# EAGLE board Radii (EAGLE 9.5.1)
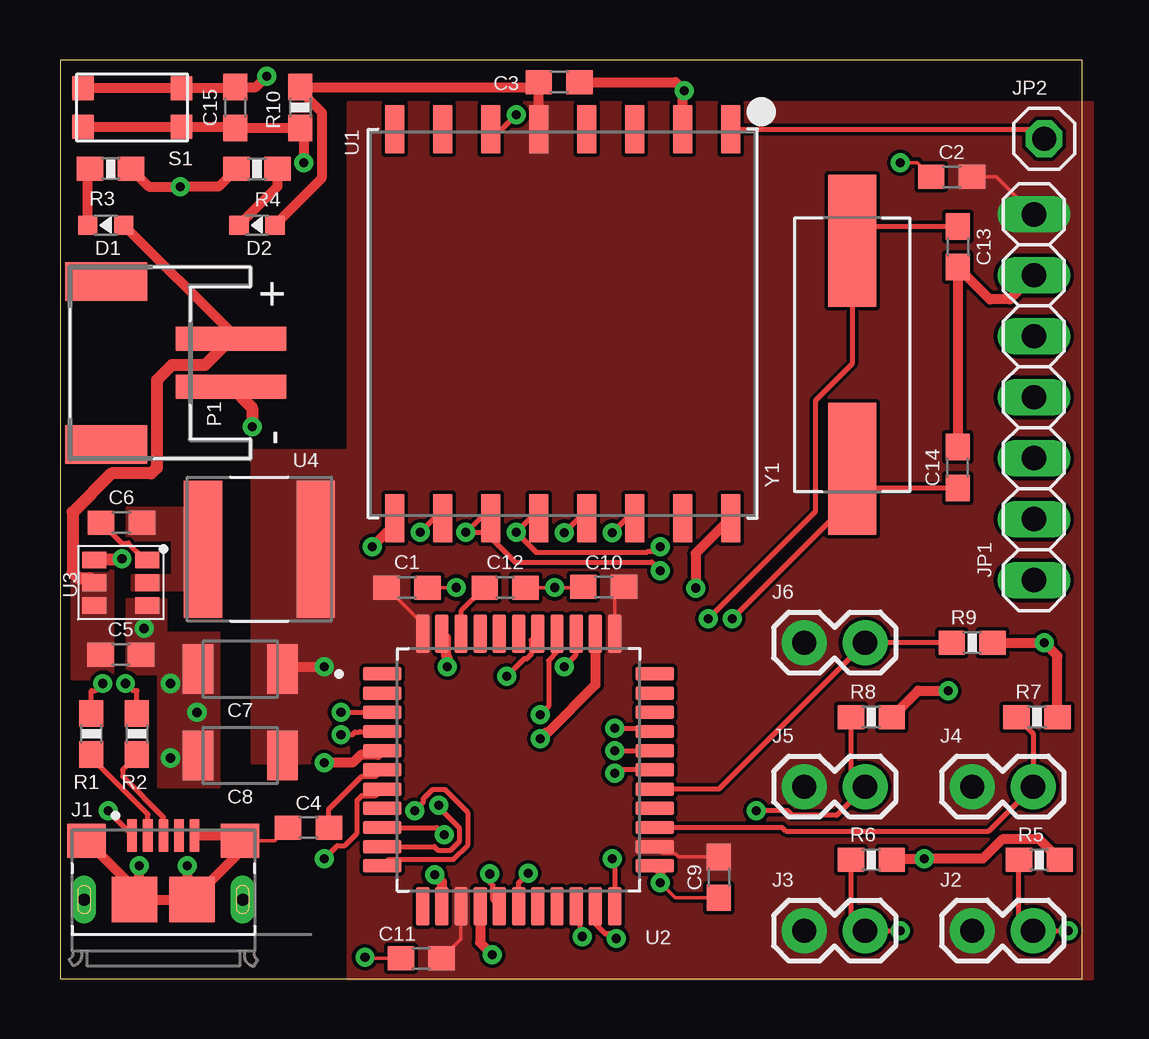
[diagram p0: board, top side]
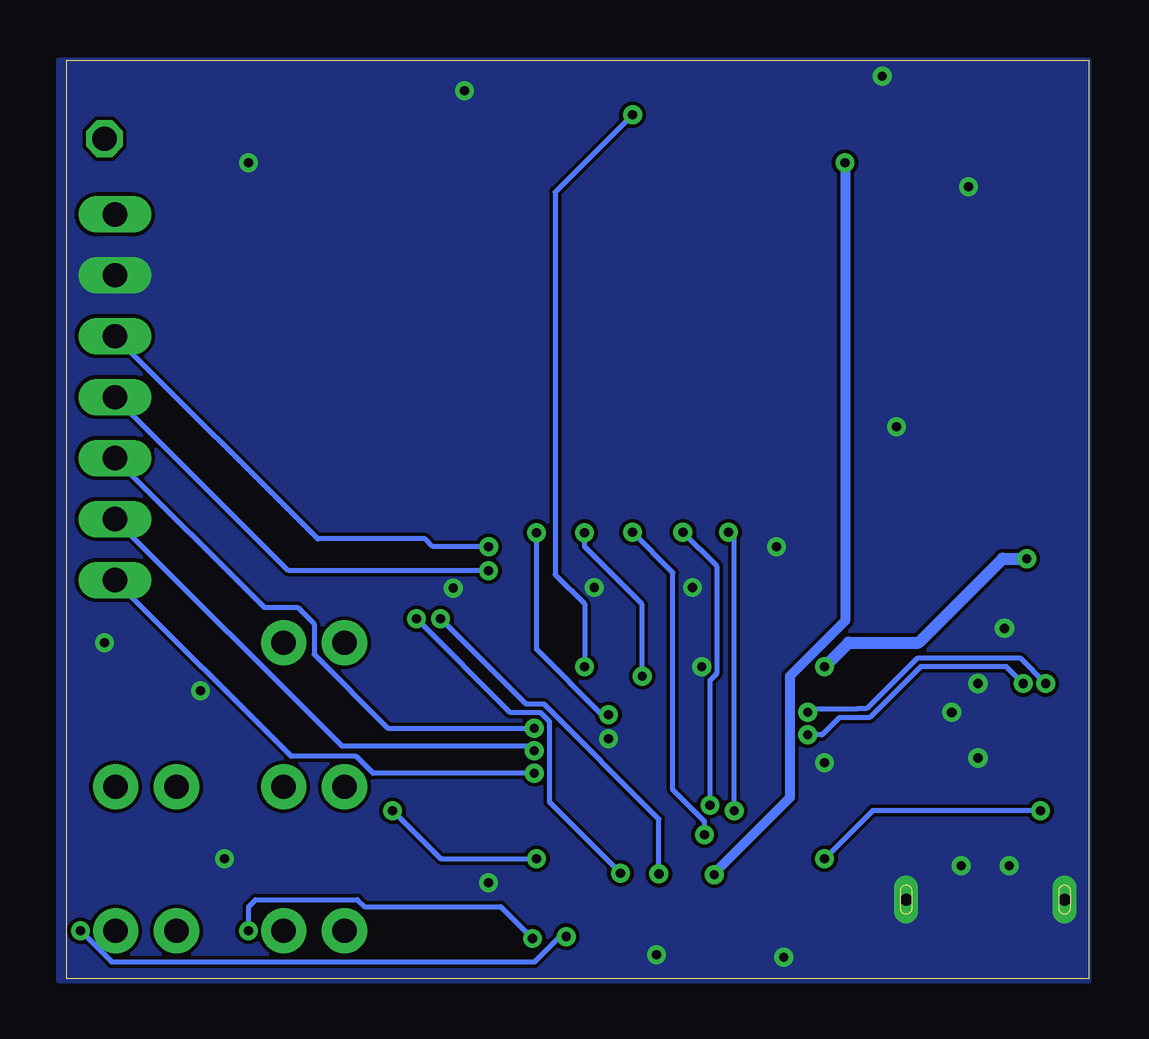
[diagram p1: board, bottom side, seen from below]

Size 42.58 x 38.28 mm. Coordinates in mm from the lower left corner, seen from the top.
Outline: 0,0 42.58,0 42.58,38.28 0,38.28 0,0
Copper layers (1*16): Top 0.0356mm / dielectric 63mil / Bottom 0.0356mm
Design rules "RJ2LayerDRU": minimum track width 6mil, minimum drill 15mil, track to track 6mil, track to pad 6mil, pad to pad 6mil, via to via 6mil, smd to smd 6mil, copper to edge 0mil, drill to drill 6mil, minimum pad ring 10mil, minimum via ring 8mil, stop-mask expansion 4mil, vias tented up to drill 0mil, thermal gap 10mil
Net classes: 1 diff: width 0.004 mm

## Footprints (pad centres in the part's own frame; a part is rotated, then mirrored left to right if it is on the bottom)
0603 = smd 1.1 x 1: 1 -0.85,0; 2 0.85,0
1210 = smd 1.27 x 2.06: 1 -1.755,0; 2 1.755,0
CHIP-LED0603 = smd 0.8 x 0.8: A 0,-0.75; C 0,0.75
FCI_10118193-0001LF = smd 0.4 x 1.35: 1 -1.3,2.675; 2 -0.65,2.675; 3 0,2.675; 4 0.65,2.675; 5 1.3,2.675 | smd 1.6 x 1.4: S1 -3.2,2.45; S2 3.2,2.45 | smd 1.9 x 1.9: S3 1.2,0; S4 -1.2,0 | drill 0.5 pad 0.9 long: S5 -3.3,0; S6 3.3,0
1X02 = drill 1.016 pad 1.88: 1 0,0; 2 2.54,0
1X07 = drill 1.016 long: 1 -7.62,0; 2 -5.08,0; 3 -2.54,0; 4 0,0; 5 2.54,0; 6 5.08,0; 7 7.62,0
1X01 = drill 1.016 octagon: 1 0,0
JST-PH-2-SMT-RA = smd 1 x 4.6: 1 1,-3.7; 2 -1,-3.7 | smd 1.6 x 3.4: NC1 -3.4,1.5; NC2 3.4,1.5
0603-RES = smd 1.1 x 1: 1 -0.85,0; 2 0.85,0
KMR2 = smd 0.9 x 1: 1.1 -2.05,0.8; 1.2 2.05,0.8; 2.1 -2.05,-0.8; 2.2 2.05,-0.8
RFMHCW_SMT = smd 2 x 0.8: 1P 8.1,-7; 2P 8.1,-5; 3P 8.1,-3; 4P 8.1,-1; 5P 8.1,1; 6P 8.1,3; 7P 8.1,5; 8P 8.1,7; 9P -8.1,7; 10P -8.1,5; 11P -8.1,3; 12P -8.1,1; 13P -8.1,-1; 14P -8.1,-3; 15P -8.1,-5; 16P -8.1,-7
QFP80P1200X1200X120-44N = smd 1.6 x 0.55: 1 -5.68,4; 2 -5.68,3.2; 3 -5.68,2.4; 4 -5.68,1.6; 5 -5.68,0.8; 6 -5.68,0; 7 -5.68,-0.8; 8 -5.68,-1.6; 9 -5.68,-2.4; 10 -5.68,-3.2; 11 -5.68,-4; 23 5.68,-4; 24 5.68,-3.2; 25 5.68,-2.4; 26 5.68,-1.6; 27 5.68,-0.8; 28 5.68,0; 29 5.68,0.8; 30 5.68,1.6; 31 5.68,2.4; 32 5.68,3.2; 33 5.68,4 | smd 0.55 x 1.6: 12 -4,-5.68; 13 -3.2,-5.68; 14 -2.4,-5.68; 15 -1.6,-5.68; 16 -0.8,-5.68; 17 0,-5.68; 18 0.8,-5.68; 19 1.6,-5.68; 20 2.4,-5.68; 21 3.2,-5.68; 22 4,-5.68; 34 4,5.68; 35 3.2,5.68; 36 2.4,5.68; 37 1.6,5.68; 38 0.8,5.68; 39 0,5.68; 40 -0.8,5.68; 41 -1.6,5.68; 42 -2.4,5.68; 43 -3.2,5.68; 44 -4,5.68
POWERREG = smd 1 x 0.7: 1 -1.099,0.95; 2 -1.099,0; 3 -1.099,-0.95; 4 1.099,-0.95; 5 1.099,0; 6 1.099,0.95
IND_1255AY-3R9N=P3 = smd 1.6 x 5.7: 1 -2.35,0; 2 2.35,0
XTAL_ECS-80-20-5PX-TR = smd 5.5 x 2: 1 -4.75,0; 2 4.75,0

## Placement (x,y rotation side)
C1  0.1uF  [0603]  14.45,16.3 0 top
C2  0.1uF  [0603]  37.15,33.42 180 top
C3  0.1uF  [0603]  20.79,37.36 0 top
C4  1.0uF  [0603]  10.35,6.3 180 top
C5  10uF  [0603]  2.52,13.5 0 top
C6  0.1uF  [0603]  2.55,19 0 top
C7  22uF  [1210]  7.5,12.9 180 top
C8  22uF  [1210]  7.5,9.3 180 top
C9  0.1uF  [0603]  27.45,4.22 270 top
C10  0.1uF  [0603]  22.64,16.32 180 top
C11  0.1uF  [0603]  15.04,0.85 180 top
C12  10nF  [0603]  18.54,16.3 0 top
C13  33pF  [0603]  37.4,30.5 270 top
C14  33pF  [0603]  37.4,21.3 90 top
C15  0.1uF  [0603]  7.3,36.3 90 top
D1  GREEN  [CHIP-LED0603]  1.9,31.4 90 top
D2  GREEN  [CHIP-LED0603]  8.2,31.4 90 top
J1  10118193-0001LF  [FCI_10118193-0001LF]  4.3,3.3 0 top
J2  BUTTON  [1X02]  38,2 0 top
J3  BUTTON  [1X02]  31,2 0 top
J4  BUTTON  [1X02]  38,8 0 top
J5  BUTTON  [1X02]  31,8 0 top
J6  BUTTON  [1X02]  31,14 0 top
JP1  [1X07]  40.57,24.23 270 top
JP2  [1X01]  41,35 0 top
P1  [JST-PH-2-SMT-RA]  3.42,25.66 90 top
R1  22Ω  [0603-RES]  1.3,10.2 90 top
R2  22Ω  [0603-RES]  3.2,10.2 90 top
R3  400Ω  [0603-RES]  2.1,33.75 0 top
R4  100Ω  [0603-RES]  8.2,33.75 180 top
R5  10K  [0603-RES]  40.8,4.95 0 top
R6  10K  [0603-RES]  33.8,4.95 0 top
R7  10K  [0603-RES]  40.7,10.9 0 top
R8  10K  [0603-RES]  33.8,10.9 0 top
R9  10K  [0603-RES]  38,14 0 top
R10  10K  [0603-RES]  10,36.3 270 top
S1  KMR2  [KMR2]  3,36.3 180 top
U1  [RFMHCW_SMT]  20.95,27.3 90 top
U2  ATMEGA32U4-AUR  [QFP80P1200X1200X120-44N]  19.1,8.7 0 top
U3  AP63203WU-7  [POWERREG]  2.52,16.5 0 top
U4  IND_1255AY-3R9N=P3  [IND_1255AY-3R9N=P3]  8.3,17.9 0 top
Y1  ECS-80-20-5PX-TR  [XTAL_ECS-80-20-5PX-TR]  33,26 90 top

## Library data of the parts
C1-C3 C6 C9-C11 C15 = SparkFun-Capacitors; PROD_ID: CAP-00810
C4 = SparkFun-Capacitors; PROD_ID: CAP-00868
C5 = SparkFun-Capacitors; PROD_ID: CAP-11015
C7 C8 = SparkFun-Capacitors
C12 = SparkFun-Capacitors; PROD_ID: CAP-00867
C13 C14 = SparkFun-Capacitors; PROD_ID: CAP-10142
D1 D2 = RoboJackets-LEDs
J1 = I'mRADIOactive; DESCRIPTION: USB - micro B USB 2.0 Receptacle Connector 5 Position Surface Mount, Right Angle; Through Hole; DIGI-KEY_PART_NUMBER: 609-4616-1-ND; DIGIKEY-PURCHASE-URL: https://snapeda.com/shop?store=DigiKey&id=4800618; MF: Amphenol ICC (FCI); MP: 10118193-0001LF; PACKAGE: None
J2-J6 JP1 U1 U3 U4 = I'mRADIOactive
JP2 = pinhead
P1 = adafruit
R1 R2 = SparkFun-Resistors; PROD_ID: RES-08698
R3 R4 = SparkFun-Resistors
R5-R10 = SparkFun-Resistors; PROD_ID: RES-00824
S1 = RoboJackets-Switches; FUNCTION: Reset
U2 = I'mRADIOactive; AVAILABILITY: Unavailable; DESCRIPTION: AVR AVR® ATmega Microcontroller IC 8-Bit 16MHz 32KB (16K x 16) FLASH 44-TQFP (10x10); MF: Microchip; MP: ATMEGA32U4-AUR; PACKAGE: TQFP-44 Microchip; PRICE: None
Y1 = I'mRADIOactive; ARROW_AMERICAS-PURCHASE-URL: https://snapeda.com/shop?store=Arrow+Americas&id=470513; DESCRIPTION: 8MHz ±30ppm Crystal 18pF 60 Ohms HC-49/US; DIGI-KEY_PART_NUMBER: XC1271CT-ND; DIGIKEY-PURCHASE-URL: https://snapeda.com/shop?store=DigiKey&id=470513; MF: ECS Inc.; MOUSER-PURCHASE-URL: https://snapeda.com/shop?store=Mouser&id=470513; MP: ECS-80-18-5PX-TR; PACKAGE: HC49/US ECS International

## Nets
3.3V: C1.1 C2.1 C3.1 C7.1 C8.1 C9.1 C10.1 C11.1 D2.A J2.1 J3.1 J4.1 J5.1 J6.1 JP1.1 R10.1 U1.5P U2.14 U2.24 U2.34 U2.44 U3.1 U4.2
9V: C5.1 D1.A P1.1 U3.2 U3.3
CS3: JP1.5 U2.30
DC_SELECT: JP1.7 U2.28
DIFF1_N: R1.2 U2.3
DIFF1_P: R2.2 U2.4
DIFF_N [diff]: J1.2 R1.1
DIFF_P [diff]: J1.3 R2.1
DISP_RESET: JP1.6 U2.29
GND: C1.2 C2.2 C3.2 C4.2 C5.2 C7.2 C8.2 C9.2 C10.2 C11.2 C12.2 C13.2 C14.2 C15.2 J1.5 J1.S1 J1.S2 J1.S3 J1.S4 J1.S5 J1.S6 JP1.2 P1.2 R3.2 R4.2 R5.2 R6.2 R7.2 R8.2 R9.2 S1.2.1 S1.2.2 U1.2P U1.9P U1.16P U2.5 U2.15 U2.23 U2.35 U2.43 U3.4
INT: U1.6P U2.36
MISO: U1.10P U2.11
MOSI3: JP1.4 U1.11P U2.10
N$1: C6.2 U3.5 U4.1
N$2: C6.1 U3.6
N$3: JP2.1 U1.1P
N$4: J1.1 U2.7
N$5: C4.1 U2.6
N$6: C13.1 U2.16 Y1.2
N$7: C12.1 U2.42
N$8: C14.1 U2.17 Y1.1
N$9: D1.C R3.1
N$10: D2.C R4.1
N$11: J2.2 R5.1 U2.20
N$12: J3.2 R6.1 U2.21
N$13: J4.2 R7.1 U2.25
N$14: J5.2 R8.1 U2.22
N$15: J6.2 R9.1 U2.27
N$17: C15.1 R10.2 S1.1.1 S1.1.2 U2.13
RADIO_RESET: U1.14P U2.37
SCK3: JP1.3 U1.12P U2.9
SS3: U1.13P U2.38
UVCC: U2.2

## Tracks (layer width: path | path; a pad name or v marks a point on that pad's centre or on a via)
3.3V  (via drill 0.38)
  Top 0.152: U2.14 16.7,1.66 C11.1 | C1.1 15.1,14.8 U2.44 | C10.1 23.1,15.93 U2.34 | C2.1 39,33.42 JP1.1 | U2.24 25.08,5.2 25.63,5.2 25.76,5.08 C9.1
  Top 0.406: C7.1 9.36,13 v11,13 | U1.5P C3.1 | C3.1 | C3.1 19.74,37.15 R10.1 10,37 10.89,36.11 10.89,33.34 D2.A
  Top 0.508: v2.58,17.5 2.53,17.45 U3.1
  Bottom 0.508: v11,13 10,14 7.08,14 3.58,17.5 v2.58,17.5
  pour Top (no thermals): 8,22 12,22 12,9 8,9
  pour Top (no thermals): 12,36.5 12,0 43,0 43,36.5
9V
  Top 0.406: D1.A 7.12,26.93 P1.1
  Top 0.508: P1.1 6.02,25.56 4.65,25.56 4.02,24.94 4.02,21.29 3.79,21.05 2.13,21.05 0.52,19.44 0.52,16.93 0.76,16.69 1.23,16.69 U3.2
  pour Top (no thermals): 0.5,17 2.2,17 2.2,12.5 0.5,12.5 0.5,14.5
CS3  (via drill 0.38)
  Top 0.2: v23.1,10.44 24.64,10.44 U2.30
  Bottom 0.2: JP1.5 34.35,15.47 32.96,15.47 32.27,14.78 32.27,13.52 29.19,10.44 v23.1,10.44
DC_SELECT  (via drill 0.38)
  Top 0.2: U2.28 23.24,8.7 v23.1,8.56
  Bottom 0.2: v23.1,8.56 29.81,8.56 30.52,9.27 33.23,9.27 JP1.7
DIFF1_N  (via drill 0.38)
  Top 0.2: v11.7,11.1 U2.3 | R1.2 1.3,12 1.48,12 v1.78,12.3
  Bottom 0.2: v1.78,12.3 2.83,13.35 7.15,13.35 9.25,11.25 9.63,11.25 9.64,11.23 11.57,11.23 v11.7,11.1
DIFF1_P  (via drill 0.38)
  Top 0.2: U2.4 12.49,10.3 12.47,10.28 12.28,10.28 12.16,10.16 v11.7,10.16 | R2.2 3.2,12 3.02,12 v2.72,12.3
  Bottom 0.2: v2.72,12.3 3.42,13 7,13 9.12,10.88 10.39,10.88 11.1,10.16 v11.7,10.16
DIFF_N
  Top 0.2: J1.2 3.65,6.85 1.3,9.2 R1.1
DIFF_P
  Top 0.2: J1.3 4.3,6.73 2.6,8.43 2.6,8.7 3.2,9.3 R2.1
DISP_RESET  (via drill 0.38)
  Top 0.2: v23.1,9.5 U2.29
  Bottom 0.2: JP1.6 31.12,9.7 23.3,9.7 v23.1,9.5
GND  (via drill 0.38, 0.4)
  Top 0.152: C11.2 12.75,0.85 v12.7,0.9 | C1.2 v16.5,16.3 | C12.2 v20.6,16.3 21.77,16.3 C10.2 | C4.2 8.95,5.75 J1.S2 | C9.2 25.62,3.38 v25,4 | C2.2 35.72,34 v35,34
  Top 0.406: J1.S4 3,3.3 3,3.85 J1.S1 | J1.S4 J1.S3 | J1.5 7.28,5.97 J1.S2 7.5,5.3 J1.S3 | J1.S4 3.3,3.5 v3.3,4.7 | v5.3,4.7 5.3,3.5 J1.S3 | C14.2 C13.2 38.74,28.31 39.57,28.31 JP1.2 | R9.2 v41,14 41.55,13.45 R7.2 | R8.2 35.75,12 v37,12 | R6.2 34.7,5 v36,5 38.45,5 39.25,5.81 40.79,5.81 R5.2 | U2.23 25,4.48 v25,4 | U2.15 17.5,1.5 v18,1 | C3.2 25.64,37.36 25.95,37.05 | 25.95,37.05 v26,37 | U1.2P 25.95,37.05 | U2.5 13.25,9.33 12.51,9.33 12.18,9 v11,9 | U1.16P 26.48,17.73 v26.48,16.28 | U1.9P 13.95,18.95 v13,18 | U2.43 16.07,14.21 16.07,13.47 16.12,13.42 v16.12,13 | v20,10 20.25,10.25 20.31,10.25 22.3,12.24 U2.35 | S1.2.2 S1.2.1 7.25,37.1 C15.2 8.15,37.15 v8.6,37.6 | R3.2 3.7,33 v5,33 6.6,33 R4.2
  Top 0.508: P1.2 8,23.78 v8,23
  other vias: 5.7,11.1 4.6,9.2 4.6,12.3 3.5,14.6
  pour Bottom (no thermals): 0,-0.1 42.9,-0.1 42.9,38.3 0,38.3
  pour Top (no thermals): 2.8,15.8 4.4,15.8 4.4,12.7 2.8,12.7
  pour Top (no thermals): 6.6,14.4 6.6,8 4.1,8 4.1,14.4
INT  (via drill 0.38)
  Top 0.2: U1.6P 18.39,35.4 v19,36 | v21,13 21.5,13.5 U2.36
  Bottom 0.2: v21,13 21,15.62 22.22,16.84 22.22,32.78 v19,36
MISO  (via drill 0.38)
  Top 0.2: v15,18.6 15.6,19.2 U1.10P | U2.11 13.69,4.97 16.39,4.97 17,5.59 17,6.92 16.04,7.87 15.5,7.87 15.13,7.5 15.13,7.36 v14.77,7
  Bottom 0.2: v15,18.6 14.77,18.37 v14.77,7
MOSI3  (via drill 0.38)
  Top 0.2: U1.11P 17.5,19.2 v16.9,18.6 17.72,18.6 18.96,17.36 24.64,17.36 v25,17 | v15.77,7.23 15.77,7.14 16.65,6.27 16.65,5.73 16.27,5.35 15.73,5.35 15.59,5.5 U2.10
  Bottom 0.2: v25,17 33.34,17 JP1.4 | v15.77,7.23 15.77,12.44 15.48,12.73 15.48,17.18 v16.9,18.6
N$1
  pour Top (no thermals): 2.8,19.6 6.5,19.6 6.5,16.2 3,16.2 3,16.8 4.7,16.8 4.7,18.3 2.8,18.3
N$2
  Top 0.2: C6.1 2.56,18.15 2.84,18.15 3.54,17.45 U3.6
N$3
  Top 0.2: U1.1P 40.6,35.4 JP2.1
N$4  (via drill 0.38)
  Top 0.2: J1.1 2,6.97 v2,7 | v11,5 11.55,5.55 11.85,5.55 12.37,6.07 12.37,7.44 12.56,7.63 13.15,7.63 U2.7
  Bottom 0.2: v2,7 9,7 v11,5
N$5
  Top 0.2: U2.6 13.15,8.43 12.56,8.43 11.2,7.07 C4.1
N$6  (via drill 0.38)
  Top 0.2: C13.1 33.6,31.35 Y1.2 33,25.62 31.47,24.09 31.47,19.47 v27,15 | U2.16 18.03,3.29 18.03,3.88 17.9,4.01 v17.9,4.37
  Bottom 0.2: v27,15 23.44,11.44 22.69,11.44 17.9,6.65 v17.9,4.37
N$7
  Top 0.2: C12.1 16.7,15.31 U2.42
N$8  (via drill 0.38)
  Top 0.2: Y1.1 33.12,21.12 | 33.12,21.12 33.8,20.45 C14.1 | U2.17 19.1,4 v19.5,4.4 | v28,15 33.12,20.12 33.12,21.12
  Bottom 0.2: v19.5,4.4 22.45,7.35 22.45,10.71 22.83,11.09 24.09,11.09 v28,15
N$9
  Top 0.406: D1.C 1.15,33.65 R3.1
N$10
  Top 0.406: R4.1 9.05,33 D2.C
N$11  (via drill 0.38)
  Top 0.2: R5.1 39.95,2.59 J2.2 v42,2 | U2.20 21.67,2.85 21.67,1.84 v21.76,1.76
  Bottom 0.2: v21.76,1.76 22.03,1.76 23.08,0.7 40.7,0.7 v42,2
N$12  (via drill 0.38)
  Top 0.2: R6.1 32.95,2.59 J3.2 v35,2 | v23.17,1.67 22.98,1.86 22.72,1.86 22.3,2.28 U2.21
  Bottom 0.2: v35,2 35,3 34.7,3.29 30.46,3.29 30.17,3 24.49,3 v23.17,1.67
N$13
  Top 0.2: U2.25 30.08,6.3 30.23,6.15 38.69,6.15 J4.2 40.54,10.21 R7.1
N$14  (via drill 0.38)
  Top 0.2: R8.1 32.95,8.59 J5.2 32.35,6.81 30.51,6.81 30.31,7 v29,7 | v23,5 23.1,4.9 U2.22
  Bottom 0.2: v29,7 27,5 v23,5
N$15
  Top 0.2: R9.1 J6.2 27.44,7.9 U2.27
N$17  (via drill 0.38)
  Top 0.406: S1.1.2 S1.1.1 7.25,35.5 C15.1 R10.2 10.15,35.3 v10.15,34 | v15.6,4.33 15.9,4.03 U2.13
  Bottom 0.406: v10.15,34 10.15,14.91 12.45,12.61 12.45,7.55 15.6,4.4 v15.6,4.33
RADIO_RESET  (via drill 0.38)
  Top 0.2: U1.14P 23.9,19.15 23.56,19.15 v23,18.59 | U2.37 20.7,13.61 20.35,13.27 20.35,11.35 v20,11
  Bottom 0.2: v23,18.59 23,13.72 20.28,11 v20,11
SCK3  (via drill 0.38)
  Top 0.2: U2.9 15.7,6.3 v16,6 | U1.12P 19.59,19.2 v19,18.6 19.83,17.77 24.44,17.77 24.47,17.8 24.8,17.8 v25,18
  Bottom 0.2: v16,6 16,6.54 17.32,7.87 17.32,16.92 v19,18.6 | v25,18 27.32,18 27.64,18.32 32.12,18.32 JP1.3
SS3  (via drill 0.38)
  Top 0.2: v21,18.59 21.61,19.2 U1.13P | U2.38 19.63,14.11 19.63,13.52 19.44,13.33 19.33,13.33 v18.6,12.6
  Bottom 0.2: v18.6,12.6 18.6,15.6 21,18 v21,18.59